# Altium PCB 2014_BallLauncher.PCBDOC
Units mil, origin at the board's own origin, x right, y up, seen from the top; angles counter-clockwise.
Board outline 4641.25 x 1191.53 mil, 4 copper layers (1-TOP, 2-SIGNAL, 3-GND, 4-BOTTOM); 76 components, 42 nets, 189 pads, 86 vias.
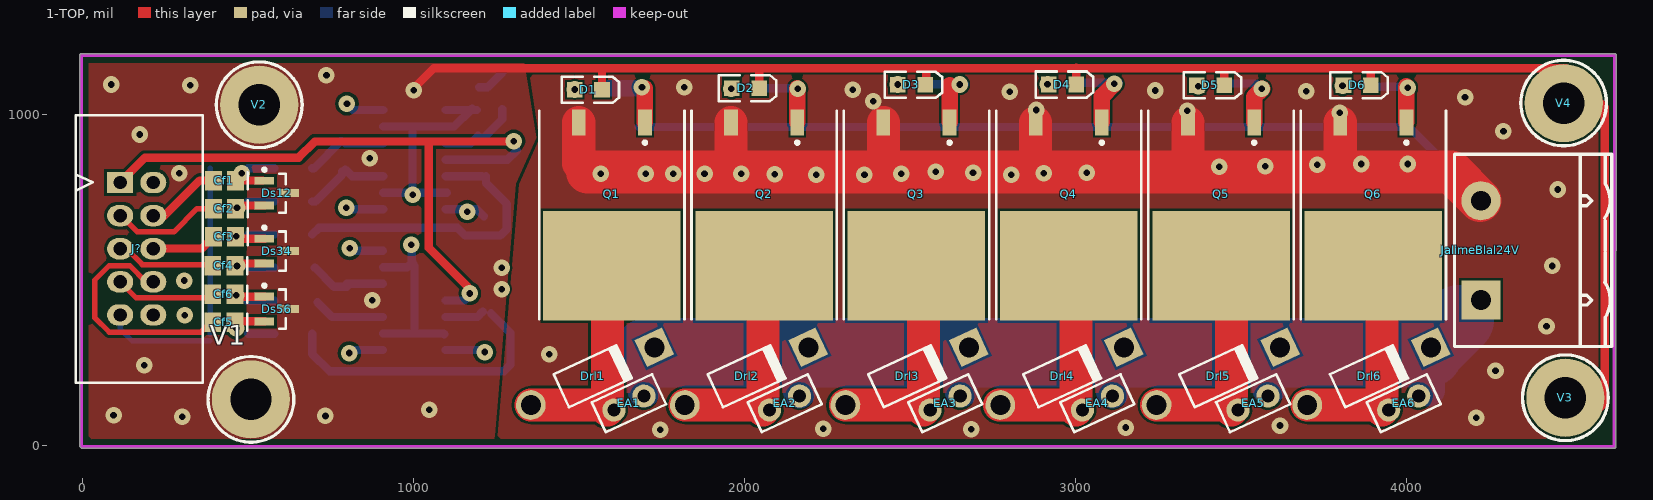
[diagram p0: 1-TOP view]
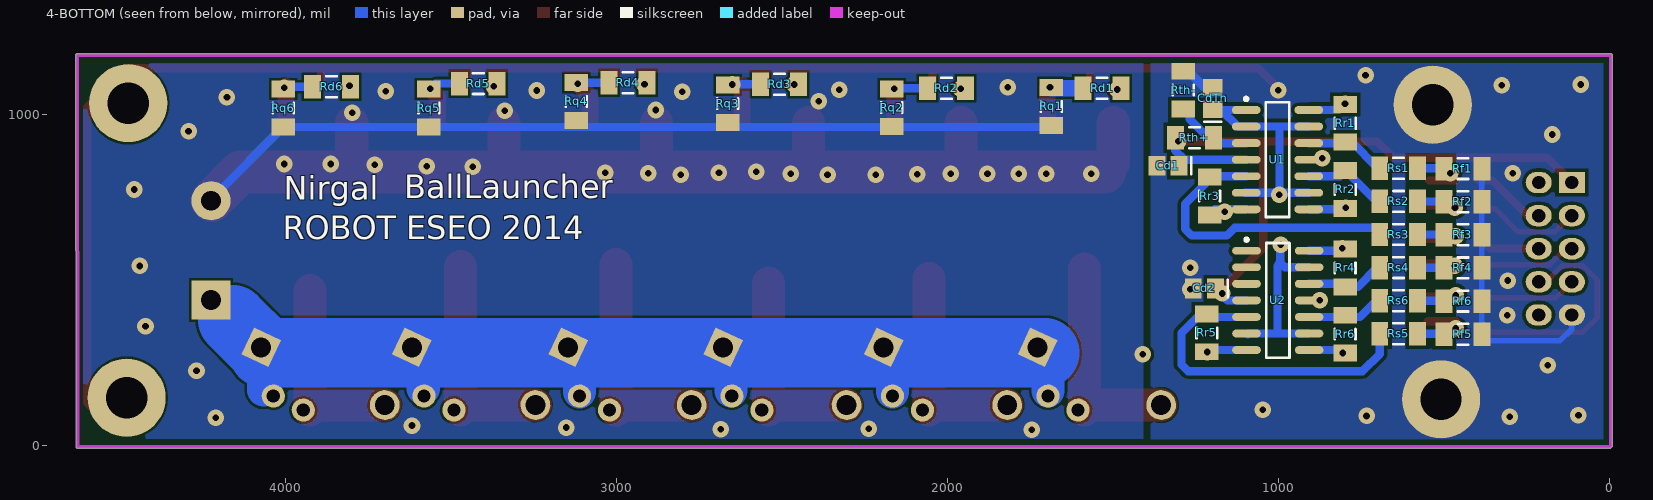
[diagram p1: 4-BOTTOM view, seen from below]
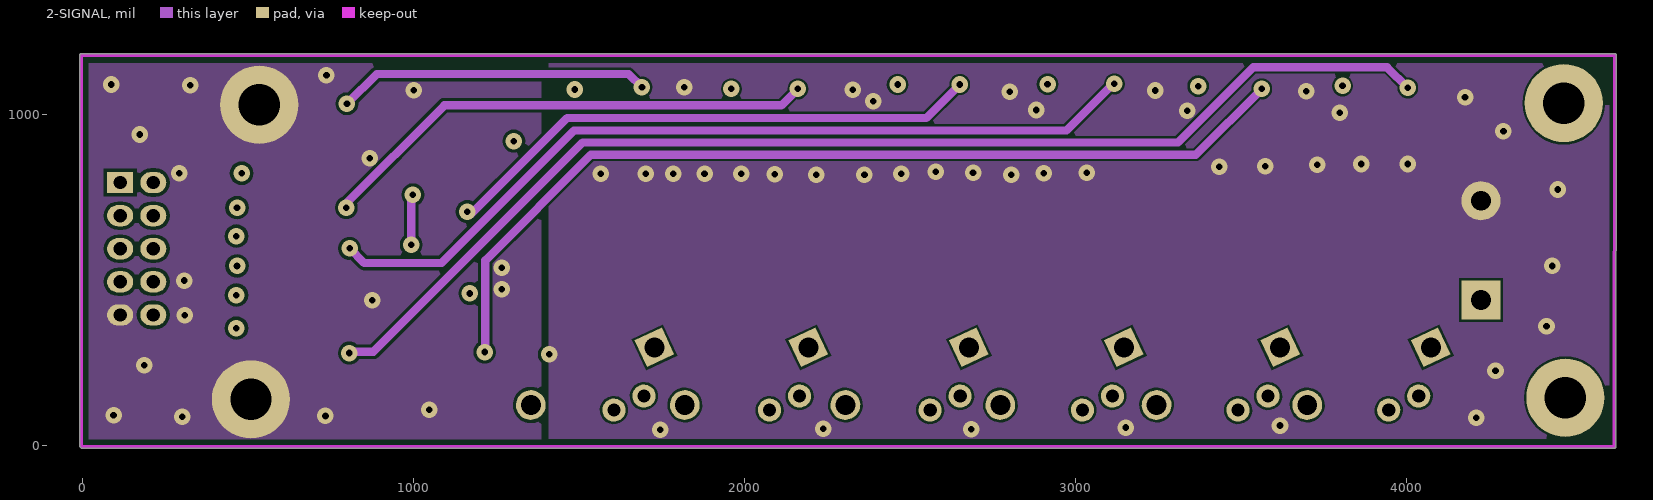
[diagram p2: 2-SIGNAL]
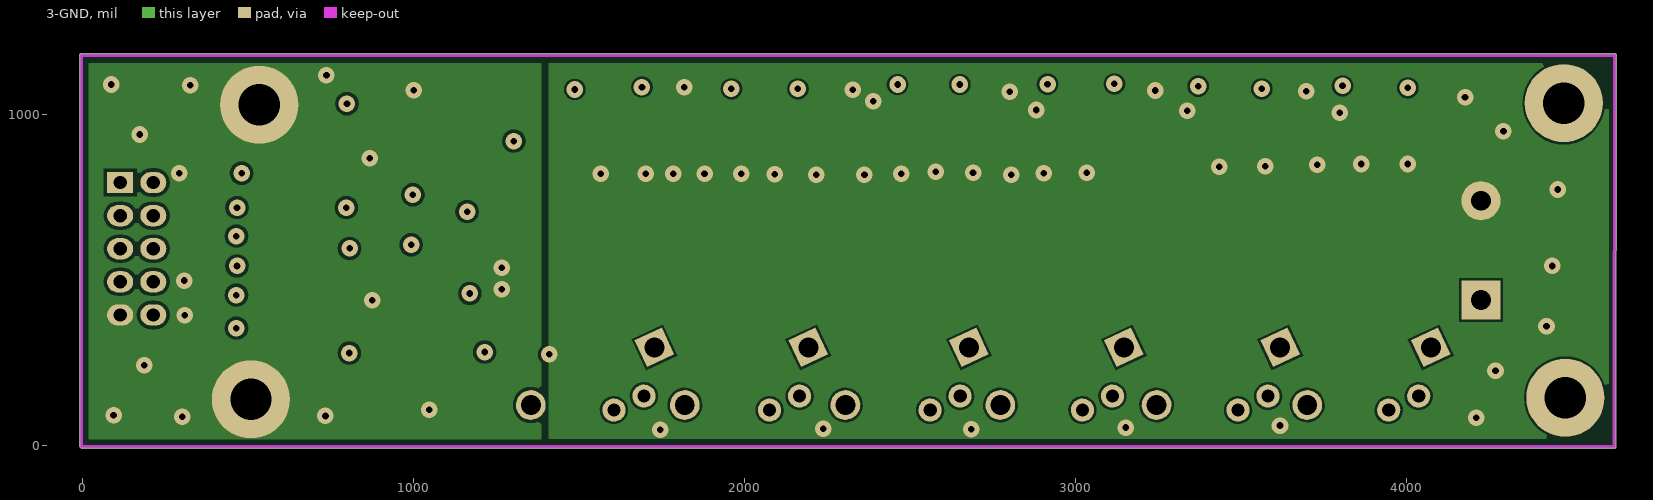
[diagram p3: 3-GND]
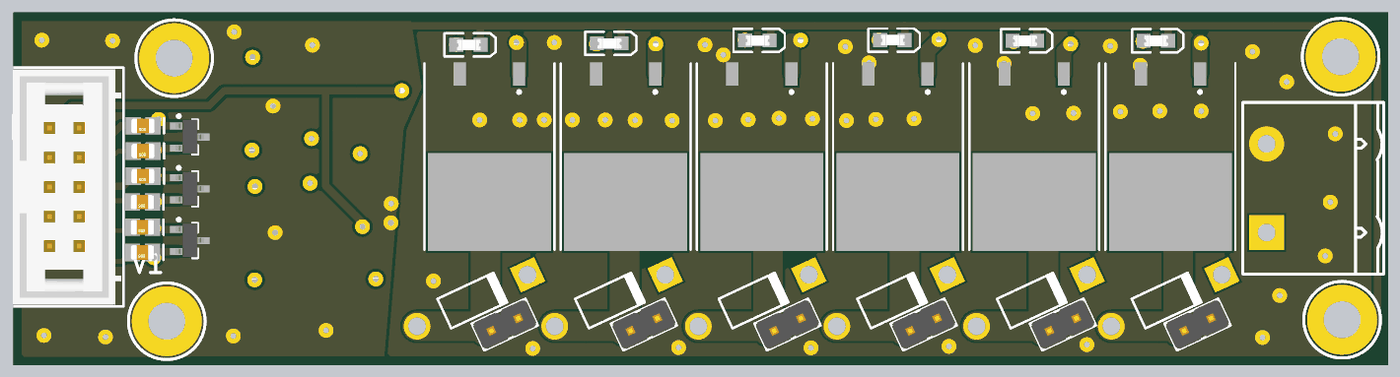
[diagram p4: 3D render of the assembled board from above, using the file's embedded part models]
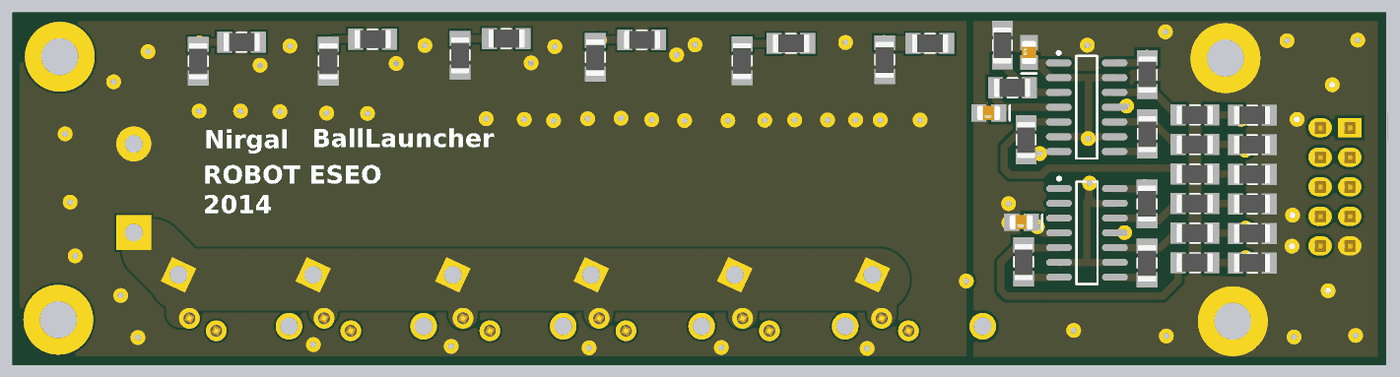
[diagram p5: 3D render of the assembled board from below, using the file's embedded part models]

## Layer stack, top to bottom
1-TOP: signal copper 1.4
Dielectric: prepreg 12.6, FR-4, Dk 4.8
2-SIGNAL: signal copper 1.4
Dielectric: core 12.6, FR-4, Dk 4.8
3-GND: signal copper 1.4
Dielectric: prepreg 12.6, FR-4, Dk 4.8
4-BOTTOM: signal copper 1.4

## Board outline
-7.51,0 ccw(c-2.5,0) -4.57,-4.57 ccw(c0,-2.5) 0,-7.51 4627.6,-7.51 ccw(c4627.6,-2.5) 4632.61,-2.5 4633.74,1179 ccw(c4628.72,1179) 4628.72,1184.01 -2.5,1184.01 ccw(c-2.5,1179) -7.51,1179

## Design rules (kind name [scope] priority, off if disabled: settings)
Clearance Clearance_2 [InNamedPolygon('1-GND') Or InNamedPolygon('2-GND') Or InNamedPolygon('3-GND') Or  InNamedPolygon('4-GND')] p1: gap=10
Clearance [All] p2: gap=7
FabricationTestPointUsage TestPointUsage [All] p1: valid=0 allowmultiple=FALSE
FabricationTestpoint Testpoint [All] p1: side=3 testpointundercomponent=TRUE minsize=40 maxsize=100 preferedsize=60 minholesize=0 maxholesize=40 preferedholesize=32 testpointgrid=1 allowsidetop=TRUE allowsidebottom=TRUE usegrid=TRUE gridtolerance=0.01
PlaneClearance [All] p1: clearance=10
PlaneConnect [All] p1: planeconnectstyle=Direct reliefexpansion=25 reliefentries=4 reliefconductorwidth=12 reliefairgap=15
PolygonConnect [All] p1: connectstyle=Direct reliefconductorwidth=10 reliefentries=4 polygonreliefangle="90 Angle"
RoomDefinition 2014_BallLauncher [InComponentClass('2014_BallLauncher')] p1: confinementstyle=ConfineIn formatcopy=TRUE lockcomponents=FALSE outline 4678.6,48 5915.6,48 5915.6,428 4678.6,428
RoutingLayers RoutingLayers_1 [All] p1: top layer_v5=TRUE mid layer 1_v5=FALSE mid layer 2_v5=FALSE bottom layer_v5=TRUE
RoutingLayers [All] p2: top layer_v5=TRUE mid layer 1_v5=FALSE mid layer 2_v5=FALSE bottom layer_v5=TRUE
RoutingVias [All] p1: holewidth=28 width=50 viastyle="Through Hole" minholewidth=28 minwidth=50 maxholewidth=28 maxwidth=50
SilkscreenOverComponentPads [All] p1: minsilkscreentomaskgap=10
SolderMaskExpansion [All] p1: expansion=0
Width [All] p1: maxlimit=500 minlimit=10 preferedwidth=15
22 further rules are at their usual default settings.

## Components (designator, comment, footprint, x,y, rotation, side; value= is the part's Value field where it differs from the comment)
Cd1 "100nF" C0805_N 1335,845 r0 bottom
Cd2 "100nF" C0805_N 1225,475 r0 bottom
CdTh "100nF" C0805_N 1199,1049 r90 bottom
Cf1 "10uF" C0805_N 430,801 r180 top
Cf2 "10uF" C0805_N 430,716 r180 top
Cf3 "10uF" C0805_N 430,631 r180 top
Cf4 "10uF" C0805_N 428,543 r180 top
Cf5 "10uF" C0805_N 428,373 r180 top
Cf6 "10uF" C0805_N 428,458 r180 top
D1 "LED" LED_0805 1529,1075 r0 top
D2 "LED" LED_0805 2004,1080 r0 top
D3 "LED" LED_0805 2505,1090 r0 top
D4 "LED" LED_0805 2961,1091 r0 top
D5 "LED" LED_0805 3408,1089 r0 top
D6 "LED" LED_0805 3851,1089 r0 top
Drl1 "Diode 1N4001" DIO10.46-5.3x2.8 1542,210 r25 top
Drl2 "Diode 1N4001" DIO10.46-5.3x2.8 2007,210 r25 top
Drl3 "Diode 1N4001" DIO10.46-5.3x2.8 2492,210 r25 top
Drl4 "Diode 1N4001" DIO10.46-5.3x2.8 2960,210 r25 top
Drl5 "Diode 1N4001" DIO10.46-5.3x2.8 3432,210 r25 top
Drl6 "Diode 1N4001" DIO10.46-5.3x2.8 3887,210 r25 top
Ds12 "BAT54A" SOT23-3N 588,763 r0 top
Ds34 "BAT54A" SOT23-3N 588,588 r0 top
Ds56 "BAT54A" SOT23-3N 588,413 r0 top
EA1 "BARRETTE2" HDR1X2 1697,150 r205 top
EA2 "BARRETTE2" HDR1X2 2167,150 r205 top
EA3 "BARRETTE2" HDR1X2 2652,150 r205 top
EA4 "BARRETTE2" HDR1X2 3112,150 r205 top
EA5 "BARRETTE2" HDR1X2 3582,150 r205 top
EA6 "BARRETTE2" HDR1X2 4037,150 r205 top
J? "HE10/10_MALE_DROIT_BAS_PROFIL" HE10/10_M_D_BP 215,795 r270 top
JalimeBlal24V "24V_in" BORNIER2_FEM_COUDE 4225,440 r90 top
Q1 "AUIRF1018ES" D2PAK 1600,760 r180 top
Q2 "AUIRF1018ES" D2PAK 2060,760 r180 top
Q3 "AUIRF1018ES" D2PAK 2520,760 r180 top
Q4 "AUIRF1018ES" D2PAK 2980,760 r180 top
Q5 "AUIRF1018ES" D2PAK 3440,760 r180 top
Q6 "AUIRF1018ES" D2PAK 3900,760 r180 top
Rd1 "1K" R1206_N 1534,1080 r180 bottom
Rd2 "1K" R1206_N 2004,1080 r180 bottom
Rd3 "1K" R1206_N 2508,1092 r180 bottom
Rd4 "1K" R1206_N 2966,1096 r180 bottom
Rd5 "1K" R1206_N 3418,1094 r180 bottom
Rd6 "1K" R1206_N 3861,1084 r180 bottom
Rf1 "220k" R1206_N 444,837 r0 bottom
Rf2 "220k" R1206_N 444,737 r0 bottom
Rf3 "220k" R1206_N 444,637 r0 bottom
Rf4 "220k" R1206_N 444,537 r0 bottom
Rf5 "220k" R1206_N 444,337 r0 bottom
Rf6 "220k" R1206_N 444,437 r0 bottom
Rq1 "10k" R1206_N 1687,1025 r270 bottom
Rq2 "10k" R1206_N 2169,1021 r270 bottom
Rq3 "10k" R1206_N 2665,1033 r270 bottom
Rq4 "10k" R1206_N 3122,1040 r270 bottom
Rq5 "10k" R1206_N 3567,1020 r270 bottom
Rq6 "10k" R1206_N 4007,1020 r270 bottom
Rr1 "1M" R1206_N 799,974 r90 bottom
Rr2 "1M" R1206_N 799,774 r270 bottom
Rr3 "1M" R1206_N 1209,754 r270 bottom
Rr4 "1M" R1206_N 800,537 r90 bottom
Rr5 "1M" R1206_N 1217,341 r270 bottom
Rr6 "1M" R1206_N 800,337 r270 bottom
Rs1 "100k" R1206_N 638,838 r0 bottom
Rs2 "100k" R1206_N 638,738 r0 bottom
Rs3 "100k" R1206_N 638,638 r0 bottom
Rs4 "100k" R1206_N 638,538 r0 bottom
Rs5 "100k" R1206_N 638,338 r0 bottom
Rs6 "100k" R1206_N 638,438 r0 bottom
Rth+ "100k" R1206_N 1255,930 r0 bottom
Rth- "50k" R1206_N 1289,1074 r270 bottom
U1 "MCP6004-I/SL" SOIC-SL14_N 1004,864 r180 bottom
U2 "MCP6004-I/SL" SOIC-SL14_N 1003,439 r180 bottom
V1 "Pad_M3" M3x6mm 510,140 r0 top
V2 "Pad_M3" M3x6mm 535,1030 r0 top
V3 "Pad_M3" M3x6mm 4480,145 r0 top
V4 "Pad_M3" M3x6mm 4475,1035 r0 top

## Footprints (in the part's own frame and the unit in brackets; to place one, negate y for a bottom-side part, rotate by r counter-clockwise, add the part's x,y. Pads: shape width x height; smd on the part's side, far side on the other; paste and mask are expansions set on the pad)
BORNIER2_FEM_COUDE [mm] "Connector; Header; 2 Position; Right Angle; Female; Pin Spacing=5.08mm Green"
  rect 3x3 hole 1.524: 1(0,0)
  round 3 hole 1.524: 2(7.62,0)
  silkscreen extent -3.56,-10.03 11.18,2.03
C0805_N [mm] "Chip Capacitor, Body 2.0x1.3mm, IPC Medium Density"
  rect 1.3x1.5 smd: 1(-0.85,0) 2(0.85,0)
  silkscreen extent -1.8,-0.65 -1.8,0.65, body extent -0.99,-0.63 1.01,0.63, height 0.8
D2PAK [mm] "D2-PAK/TO-263-AB; 3 Leads (1 Cropped); Body 15.5 (inc. leads) x 10.5 mm (LxW max)"
  rect 1.05x2 smd: 1(-2.54,-5.5) 3(2.54,-5.5)
  rect 10.55x8.4 smd: 2(0,5.5)
  silkscreen extent -5.58,-6.4 5.58,9.6
DIO10.46-5.3x2.8 [mil] "Diode, Axial; Body 5.2 x 2.7 mm (LxDia. max), Lead Dia. 0.86 mm (max)"
  round 90 hole 60: 1(-205.91,0)
  rect 90x90 hole 60: 2(205.91,0)
  silkscreen extent -104,-55 108,55
HDR1X2 [mil]
  round 70 hole 40: 1(0,0) 2(100,0)
  silkscreen extent -50,-50 150,50, body extent -82,-120 182,120, height 398
HE10/10_M_D_BP [mm] "HE10 ; 10 CONTACTS ; MALE ;  DROIT; BAS PROFIL ; ESPACEMENTS BROCHES = 2.54 mm"
  rect 1.63x2 hole 1.016: 1(0,-2.54)
  oval 1.63x2 hole 1.016: 2(0,0) 3(2.54,-2.54) 4(2.54,0) 5(5.08,-2.54) 6(5.08,0) 7(7.62,-2.54) 8(7.62,0) 9(10.16,-2.54) 10(10.16,0)
  silkscreen extent -5.16,-5.95 15.36,3.78, body extent -5,-5.8 15.2,3.6, height 8.8
LED_0805 [mm] "SM LED; 2 Flat Leads"
  rect 1.2x1.2 smd: 1(-1.05,0) 2(1.05,0)
  silkscreen extent -2.05,-1 2.35,1, body extent -1.05,-0.64 1.06,0.64, height 1.2
M3x6mm [mm] "Vis M3 X 6mm"
  round 6 hole 3.175: 1(0,0)
  silkscreen extent -3.29,-3.28 3.29,3.28
R1206_N [mm] "Chip Resistor, Body 3.2x1.6mm, IPC Medium Density"
  rect 1.3x1.8 smd: 1(-1.45,0) 2(1.45,0)
  silkscreen extent -0.4,-0.8 0.4,0.8, body extent -1.68,-0.87 1.68,0.87, height 0.71
SOIC-SL14_N [mm] "SOIC, 14-Leads, Body 8.7x3.9mm, Pitch 1.27mm, IPC Medium Density"
  oval 2.2x0.6 smd: 1(-2.4,3.81) 2(-2.4,2.54) 3(-2.4,1.27) 4(-2.4,0) 5(-2.4,-1.27) 6(-2.4,-2.54) 7(-2.4,-3.81) 8(2.4,-3.81) 9(2.4,-2.54) 10(2.4,-1.27) 11(2.4,0) 12(2.4,1.27) 13(2.4,2.54) 14(2.4,3.81)
  silkscreen extent -2.53,-4.4 0.9,4.78, body extent -2,-4.38 2,4.38, height 1.75
SOT23-3N [mm] "SOT23, 3-Leads, Body 2.9x1.3mm, Pitch 0.95mm, Lead Span 2.5mm, IPC Medium Density"
  rect 1.5x0.6 smd: 1(-0.95,0.95) 2(-0.95,-0.95) 3(0.95,0)
  silkscreen extent -1.07,-1.5 0.7,1.92, body extent -1.24,-1.5 1.23,1.5, height 1.1

## Part data
Cd1 Cd2 CdTh Cf1 Cf2 Cf3 Cf4 Cf5 Cf6: library part Condensateur, "Capacitor"
D1 D2 D3 D4 D5 D6: "Typical LED"
Drl1 Drl2 Drl3 Drl4 Drl5 Drl6: "1 Amp General Purpose Rectifier"
Ds12 Ds34 Ds56: library part "Diode Shottky double  BAT54A", "DIODE SCHOTTKY DOUBLE"
EA1 EA2 EA3 EA4 EA5 EA6: "Header, 2-Pin"
J?: "EMBASE HE10/10 MALE DROIT BAS PROFIL"
JalimeBlal24V: library part BORNIER2, "Terminal blocks, 2 pins, pitch=5mm"
Q1 Q2 Q3 Q4 Q5 Q6: library part IRF1010S, "HEXFET N-Channel Power MOSFET"
Rd1 Rd2 Rd3 Rd4 Rd5 Rd6 Rf1 Rf2 Rf3 Rf4 Rf5 Rf6 Rq1 Rq2 Rq3 Rq4 Rq5 Rq6 Rr1 Rr2 Rr3 Rr4 Rr5 Rr6 Rs1 Rs2 Rs3 Rs4 Rs5 Rs6 Rth+ Rth-: library part Resistor, "Resistor"
U1 U2: "1 MHz, Low-Power Operational Amplifier, 14-Pin SOIC, Industrial Temperature"
V1 V2 V3 V4: library part "Vis M3 X 6mm _TORX_Tête 6mm", "Vis M3 X 6mm _TORX_Tête 6mm"

## Via types
v1: diameter 50, hole 20, 1-TOP to 4-BOTTOM, 86 vias

## Nets (pads, with @x,y where several pads share a name; then routed paths per layer and width w, separated by ;. In a path a pad name is that pad's centre, name@x,y a point inside that pad or via, vN(x,y) a via of type N, cw(c..) or ccw(c..) an arc to the next point about the centre after c; other vN are vias at no path point)
5V: Cd1.1 Cd2.1 J?.1 Rth+.2 U1.4 U2.4 | length 2035.6
  1-TOP w25: J?.1 190,870 654,870 703,919 1047,919 ; v1@1165,479 1047,597 1047,919 ; v1@1297,919 1047,919
  4-BOTTOM w25: U2.4 1155,439 Cd2.1@1176,460 ; U1.4 1285,864 1313,892
  other v1: 1171,460 1304,920
24V: Drl1.2 Drl2.2 Drl3.2 Drl4.2 Drl5.2 Drl6.2 EA1.1 EA2.1 EA3.1 EA4.1 EA5.1 EA6.1 JalimeBlal24V.1 | length 3337
  4-BOTTOM w100: EA1.1@1697,166 1697,265.41 1712.61,281.02 Drl1.2 ; EA2.1@2167,163 2167,270.41 2177.61,281.02 Drl2.2 ; EA3.1@2654,166 2654,272.41 2662.61,281.02 Drl3.2 ; EA4.1@3112,163 3112,262.41 3130.61,281.02 Drl4.2 ; EA5.1@3584,173 3584,262.41 3602.61,281.02 Drl5.2 ; EA6.1@4066,168 Drl6.2@4066,281.02 ; 4160,381 JalimeBlal24V.1@4169,381
  4-BOTTOM w210: Drl1.2@1706.98,281.02 1712.61,281.02 2177.61,281.02 2662.61,281.02 3130.61,281.02 3602.61,281.02 4066,281.02 4066,287 4160,381
CDE1: Cf1.2 J?.4 | length 212.4
  1-TOP w16: J?.4@228,695 J?.4@249,695
  1-TOP w25: J?.4@249,695 355,801 Cf1.2
CDE2: Cf2.2 J?.3 | length 334.9
  1-TOP w16: J?.3@113,700 167,646 277,646 347,716 Cf2.2
CDE3: Cf3.2 J?.6 | length 196
  1-TOP w25: J?.6@215,596 361.54,596 Cf3.2
CDE4: Cf4.2 J?.5 | length 293.9
  1-TOP w16: J?.5 134,595 182,547 Cf4.2@389,547
CDE5: Cf5.2 J?.8 | length 704.5
  1-TOP w16: J?.8 193,495 144,544 82,544 38,500 38,387 82,343 359,343 Cf5.2@385,369
CDE6: Cf6.2 J?.7 | length 302.9
  1-TOP w16: J?.7 163,447 Cf6.2@398,447
EA1: Drl1.1 EA1.2 Q1.2 | length 647.3
  1-TOP w100: Drl1.1 EA1.2@1577.02,122.98 ; EA1.2@1586.37,107.74 Q1.2@1586.37,533.37
EA2: Drl2.1 EA2.2 Q2.2 | length 631.5
  1-TOP w100: Drl2.1 EA2.2@2054.02,122.98 ; EA2.2@2056.37,107.74 Q2.2@2056.37,505.63
EA3: Drl3.1 EA3.2 Q3.2 | length 611.5
  1-TOP w100: Drl3.1 EA3.2@2534.02,122.98 ; EA3.2@2541.37,107.74 Q3.2@2541.37,490.63
EA4: Drl4.1 EA4.2 Q4.2 | length 651.5
  1-TOP w100: Drl4.1@2770.39,122.98 2983.02,122.98 ; EA4.2@3001.37,107.74 Q4.2@3001.37,546.63
EA5: Drl5.1 EA5.2 Q5.2 | length 653.5
  1-TOP w100: Drl5.1 EA5.2@3466.02,122.98 ; EA5.2@3471.37,107.74 Q5.2@3471.37,540.63
EA6: Drl6.1 EA6.2 Q6.2 | length 586.9
  1-TOP w100: Drl6.1 EA6.2@3926.37,122.98 ; EA6.2@3926.37,107.74 EA6.2@3926.37,122.98 ; Q6.2@3926.37,468.63 EA6.2@3926.37,122.98
GND: Cd1.2 Cd2.2 CdTh.2 D1.2 D2.2 D3.2 D4.2 D5.2 D6.2 Ds12.3 Ds34.3 Ds56.3 J?.9 Rf1.1 Rf2.1 Rf3.1 Rf4.1 Rf5.1 Rf6.1 Rth-.1 U1.11 U2.11 V1.1 V2.1 V3.1 V4.1 | length 5881.5
  1-TOP w25: v1@1000,1078 1062,1140 1570,1140 ; D1.2@1570,1078 1570,1140 ; D2.2 2045.34,1139.34 ; D3.2@2549.34,1097 2549.34,1138 ; D4.2 3002.34,1140 ; 3002.34,1141.66 3002.34,1140 ; D5.2 3449.34,1134 ; D6.2 3892.34,1140 ; V3.1@4535,67 4599,131 4599,1022 4481,1140 3892.34,1140 ; 1570,1140 3002.34,1140 ; 3002.34,1140 3892.34,1140
  4-BOTTOM w16: J?.9 115,353 151,317 Rf5.1@386,317 ; Rf5.1 Rf6.1 Rf4.1 Rf3.1 Rf2.1 Rf1.1 Rf1.1@386.91,838.09
  4-BOTTOM w25: CdTh.2 1224.46,1082.46 Rth-.1@1269,1127
  other v1: 303,87 735,90 95,92 1048,109 188,243 310,394 876,440 1267,473 308,499 1268,538 293,823 869,868 174,940 1002,1074 327,1089 88,1091 738,1119
GND_24: JalimeBlal24V.2 Q1.3 Q2.3 Q3.3 Q4.3 Q5.3 Q6.3 Rq1.2 Rq2.2 Rq3.2 Rq4.2 Rq5.2 Rq6.2 | length 6115.7
  1-TOP w100: Q1.3 1500,853 1526,827 ; 1960,853 Q2.3 ; 2420,859 Q3.3 ; 2880,846 Q4.3 ; 3340,863 Q5.3 ; 3800,858 Q6.3
  1-TOP w130: 1526,827 4136,827 JalimeBlal24V.2@4222,741
  4-BOTTOM w25: Rq1.2@1680.91,962.91 Rq5.2 Rq6.2 JalimeBlal24V.2@4214.91,755
  other v1: 1746,48 2686,50 2239,51 3152,55 3618,61 4211,85 4269,227 1411,276 4423,361 4440,543 4457,774 2217,819 2363,819 2806,819 2092,820 1567,821 1702,821 1785,821 1880,821 1991,821 2474,822 2905,823 2691,825 3034,825 2578,827 3435,843 3573,844 3731,849 3864,851 4004,851 4293,950 3798,1006 3338,1012 2882,1014 2390,1041 4177,1052 2802,1069 3697,1071 3241,1073 2328,1075 1819,1083
NetD1_1: D1.1 Rd1.2
  other v1: 1488,1076
NetD2_1: D2.1 Rd2.2
  other v1: 1961,1078
NetD3_1: D3.1 Rd3.2
  other v1: 2463,1091
NetD4_1: D4.1 Rd4.2
  other v1: 2916,1092
NetD5_1: D5.1 Rd5.2
  other v1: 3371,1086
NetD6_1: D6.1 Rd6.2
  other v1: 3807,1087
NetRr1_1: Rr1.1 Rs1.2 U1.12 | length 235.4
  4-BOTTOM w25: Rs1.2 700,838 Rr1.1@782,920 ; Rr1.1@795,914 U1.12
NetRr2_1: Rr2.1 Rs2.2 U1.10 | length 255.8
  4-BOTTOM w25: Rs2.2 705,738 785,818 Rr2.1@785,828 ; Rr2.1@795,834 815,814 U1.10
NetRr3_1: Rr3.1 Rs3.2 U1.5 | length 908.6
  4-BOTTOM w25: Rs3.2 715.09,658 1134,658 1157,635 1263,635 1283,655 1283,730 1220,793 Rr3.1@1220,814 ; U1.5 Rr3.1@1208,814
NetRr4_1: Rr4.1 Rs4.2 U2.12 | length 230.6
  4-BOTTOM w25: Rs4.2@703,538 761.09,479.91 Rr4.1 ; Rr4.1@799,489 U2.12
NetRr5_1: Rr5.1 Rs5.2 U2.5 | length 988.4
  4-BOTTOM w25: Rs5.2 695.09,276.91 747,225 1274,225 1294,245 1294,341 Rr5.1@1235,400 ; U2.5 1194,389 Rr5.1@1210,405
NetRr6_1: Rr6.1 Rs6.2 U2.10 | length 215.7
  4-BOTTOM w25: Rs6.2@711,433 755,389 U2.10
NetRth+_1: Rth+.1 Rth-.2 U1.3 | length 231.3
  4-BOTTOM w25: U1.3 1174,914 Rth+.1@1196,936 ; Rth+.1 1212,930 1269,987 Rth-.2@1269,1017
VC1: Cf1.1 Ds12.1 Rf1.2 Rs1.1 | length 162.4
  1-TOP w25: Cf1.1 Ds12.1@546,801
  4-BOTTOM w25: Rf1.2@501,838 Rs1.1
  other v1: 482,823
VC2: Cf2.1 Ds12.2 Rf2.2 Rs2.1 | length 162.9
  1-TOP w25: Cf2.1@467.6,725.6 Ds12.2
  4-BOTTOM w25: Rf2.2@501,738 Rs2.1
  other v1: 468,719
VC3: Cf3.1 Ds34.1 Rf3.2 Rs3.1 | length 161.9
  1-TOP w25: Cf3.1@468.6,625.4 Ds34.1
  4-BOTTOM w25: Rf3.2@501,638 Rs3.1
  other v1: 466,633
VC4: Cf4.1 Ds34.2 Rf4.2 Rs4.1 | length 159.1
  1-TOP w25: Cf4.1@467.4,550.6 Ds34.2
  4-BOTTOM w25: Rf4.2@505,538 Rs4.1
  other v1: 468,543
VC5: Cf5.1 Ds56.2 Rf5.2 Rs5.1 | length 167.1
  1-TOP w25: Cf5.1@463.4,375.6 Ds56.2
  4-BOTTOM w25: Rf5.2@501,338 Rs5.1
  other v1: 466,355
VC6: Cf6.1 Ds56.1 Rf6.2 Rs6.1 | length 162.9
  1-TOP w25: Cf6.1@469.6,450.4 Ds56.1
  4-BOTTOM w25: Rf6.2@499,438 Rs6.1
  other v1: 466,455
VG1: Q1.1 Rd1.1 Rq1.1 Rr1.2 U1.14 | length 1262.6
  1-TOP w50: Q1.1 v1@1700,1080
  2-SIGNAL w25: v1(800,1033) 890,1123 1651,1123 v1(1691,1083)
  4-BOTTOM w25: Rr1.2@799,1033 818,1014 U1.14
  4-BOTTOM w50: Rd1.1 Rq1.1@1687,1080
VG2: Q2.1 Rd2.1 Rq2.1 Rr2.2 U1.8 | length 1842.1
  1-TOP w50: Q2.1 v1@2160,1080
  2-SIGNAL w25: v1@791,725 1094,1028 2112,1028 v1(2162,1078)
  4-BOTTOM w25: Rr2.2@797,714 U1.8 ; Rd2.1 Rq2.1@2170,1080
  other v1: 798,719
VG3: Q3.1 Rd3.1 Rq3.1 Rr3.2 U1.7 | length 1978.7
  1-TOP w50: Q3.1 2620,1089
  2-SIGNAL w25: v1@1173.5,698.5 1465,990 2550,990 v1(2651,1091)
  4-BOTTOM w25: U1.7 1193,714 Rr3.2@1214,693 ; Rd3.1 Rq3.1@2667,1092
  other v1: 1163,707
VG4: Q4.1 Rd4.1 Rq4.1 Rr4.2 U2.14 | length 2879.8
  1-TOP w50: Q4.1 3080,1055 v1@3114,1089
  2-SIGNAL w25: v1@807,597 852,552 1086,552 1486,952 2973,952 v1@3119,1098
  4-BOTTOM w25: Rr4.2@821,589 U2.14 ; Rd4.1 Rq4.1@3132,1096
  other v1: 808,596 3118,1093
VG5: Q5.1 Rd5.1 Rq5.1 Rr5.2 U2.7 | length 3134.3
  1-TOP w50: Q5.1 3540,1054 v1@3564,1078
  2-SIGNAL w25: v1@1218,288 1218,560 1537,879 3364,879 v1(3563,1078)
  4-BOTTOM w25: U2.7 1207,289 Rr5.2@1214,282 ; Rd5.1 Rq5.1@3547,1094
  other v1: 1216,283
VG6: Q6.1 Rd6.1 Rq6.1 Rr6.2 U2.8 | length 3883.1
  1-TOP w50: Q6.1 v1@4000,1086
  2-SIGNAL w25: v1@821,284 880,284 1512,916 3310,916 3537,1143 3942,1143 v1(4004,1081)
  4-BOTTOM w25: Rr6.2@797,280 806,289 U2.8 ; Rd6.1 Rq6.1@4012,1084
  other v1: 807,280
VTH: CdTh.1 U1.1 U1.2 U1.6 U1.9 U1.13 U2.6 U2.9 U2.13 | length 1477.5
  2-SIGNAL w25: v1(994,607) v1@994,763
  4-BOTTOM w25: U2.9 1004,339 ; U2.13 981,539 996,554 ; U1.9 v1@998,764 ; U1.13 998,964 ; v1@996,610 996,554 ; 998,556 996,554 ; v1@998,766 v1@998,764 ; v1@998,771 998,964 ; U1.2@1091,964 998,964 ; U2.6@1094,337 1092,339 1004,339 ; U1.2 1124,964 CdTh.1@1174,1014 ; U1.1 CdTh.1@1174,1014 ; U1.6@1102,764 U1.6 v1@998,764 ; CdTh.1@1178,1018 CdTh.1@1174,1014 ; CdTh.1@1192,1014 CdTh.1@1174,1014 ; 996,554 996,552 1004,544 1004,339
  other v1: 999,758
pads on no net: J?.2 J?.10 U2.1 U2.2 U2.3

## Polygon pours and split planes (outlines as drawn)
GND_24 on 2-SIGNAL "2-GND24" (solid, remove dead copper, pour order 1005): 1410,1156 4612,1156 4612,21 1410,21
GND on 2-SIGNAL "2-GND" (solid, remove dead copper, pour order 1001): 20,1155 1387,1155 1387,20 20,20
GND on 1-TOP "1-GND" (solid, remove dead copper, pour order 1000): 20,1155 1336,1155 1371,930 1310,792 1245,21 20,20
GND_24 on 1-TOP "1-GND24" (solid, remove dead copper, pour order 1004): 1212,1156 4612,1156 4612,21 1212,21
GND_24 on 3-GND "3-GND24" (solid, remove dead copper, pour order 1006): 1410,1156 4611,1156 4611,21 1410,21
GND on 3-GND "3-GND" (solid, remove dead copper, pour order 1002): 20,1155 1387,1155 1387,20 20,20
GND_24 on 4-BOTTOM "4-GND24" (solid, remove dead copper, pour order 1007): 4611,1156 1410,1156 1410,21 4611,21
GND on 4-BOTTOM "4-GND" (solid, remove dead copper, pour order 1003): 1387,1155 20,1155 20,20 1387,20

## Keep-outs
Keep-Out Layer:
  lines w10: -2.5,0 -2.5,1179 4628.72,1179 4627.6,-2.5 0,-2.5

## Silkscreen, mask and mechanical layers (free items; w line width, h text height)
Bottom Overlay:
  text "BallLauncher" at 3641,723 h120
  text "Nirgal" at 4005,719 h120
  text "ROBOT ESEO 2014" at 4009,600 h120